# EAGLE board TinkerAccess (EAGLE 9.5.2)
REV: A
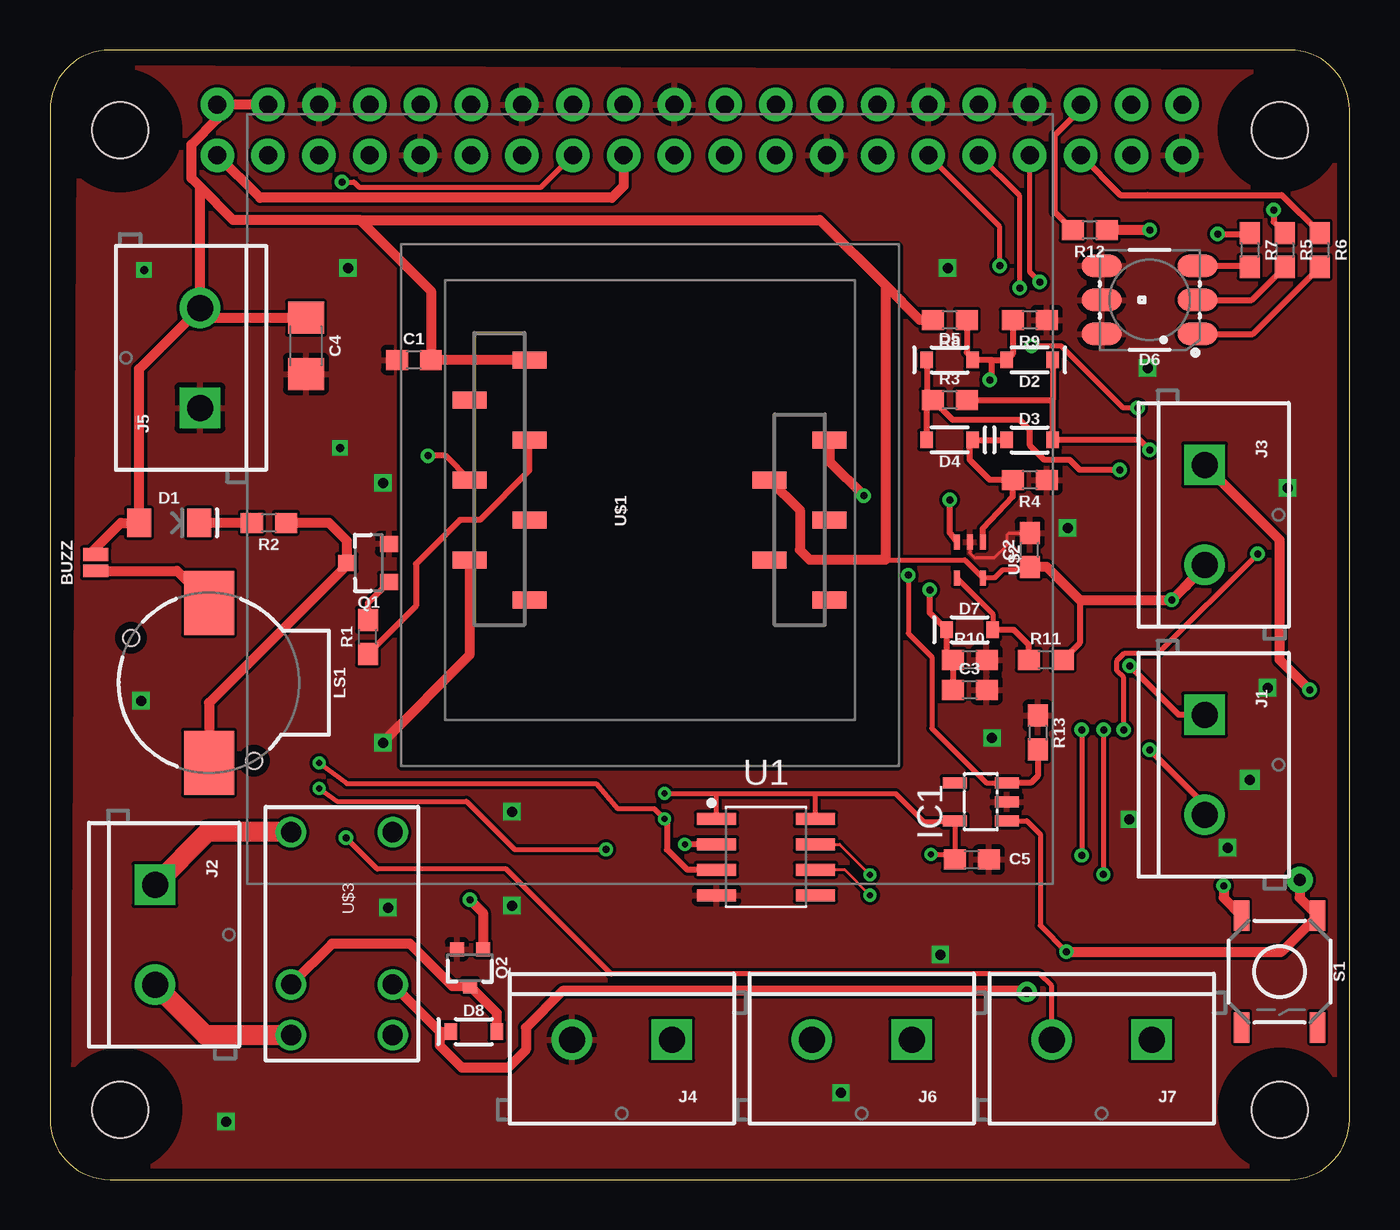
[diagram p0: board, top side]
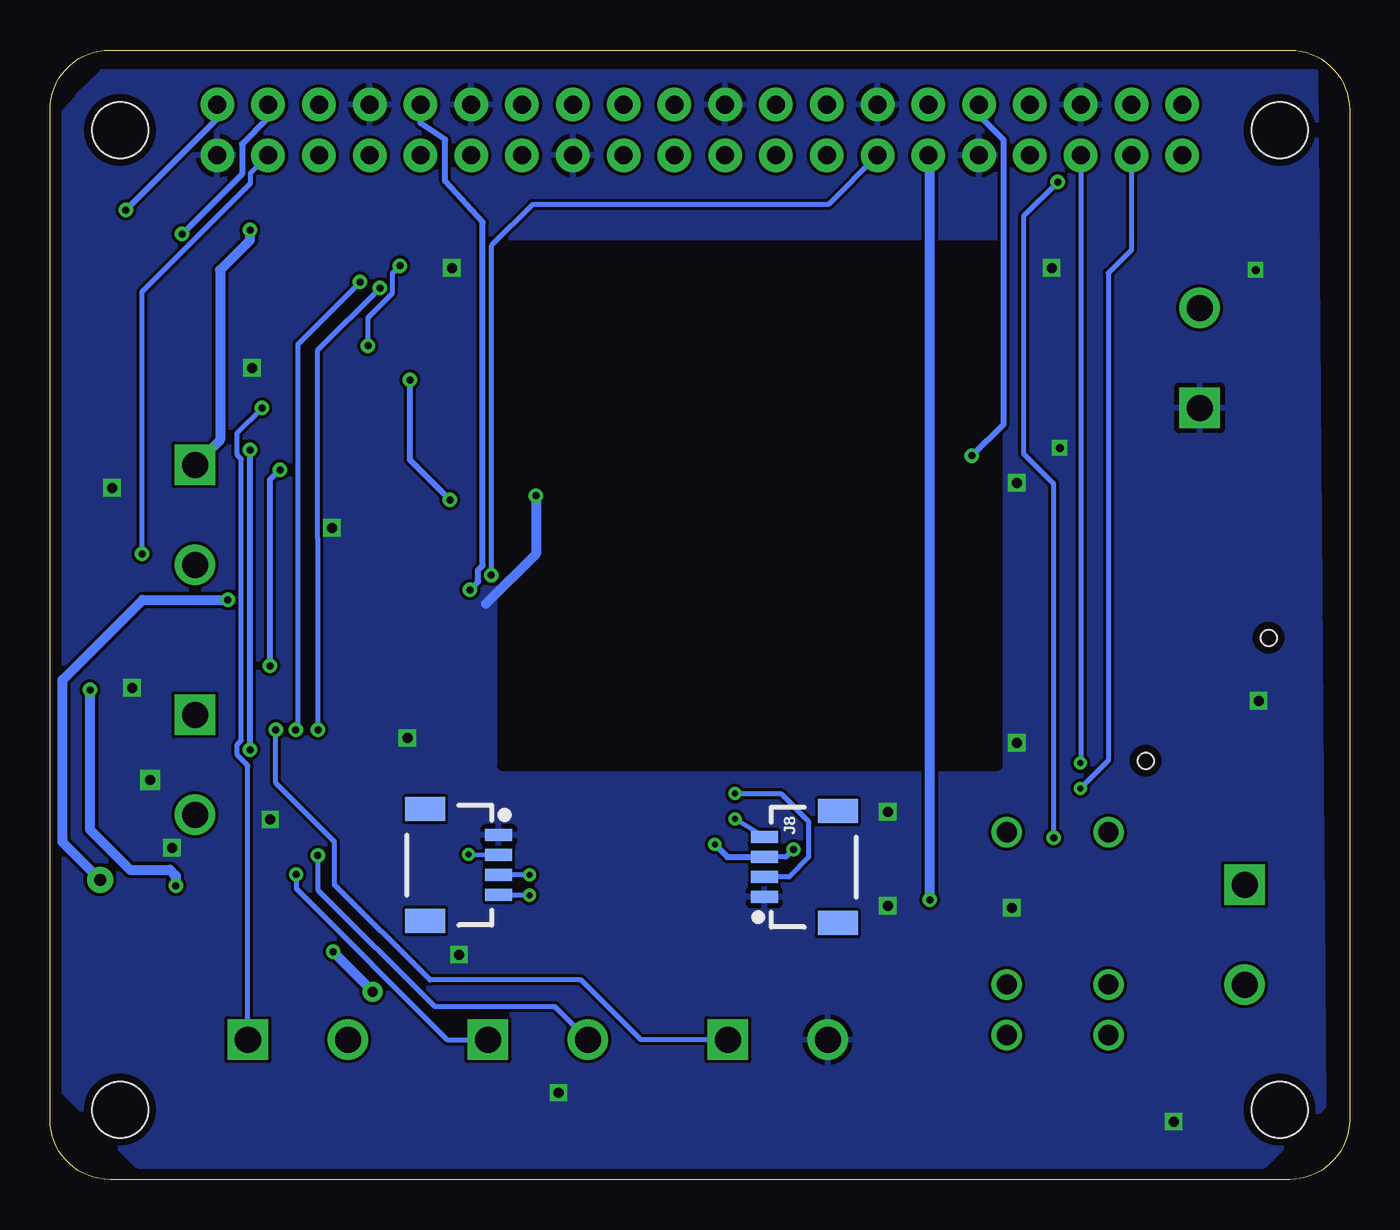
[diagram p1: board, bottom side, seen from below]

Size 65 x 56.5 mm. Coordinates in mm from the lower left corner, seen from the top.
Copper layers (1*16): Top 0.0356mm / dielectric 1.5011mm / Bottom 0.0356mm
Design rules "LaenPCBOrder *": minimum track width 6mil, minimum drill 0.3mm, track to track 6mil, track to pad 6mil, pad to pad 6mil, via to via 6mil, smd to smd 6mil, copper to edge 15mil, drill to drill 6mil, minimum pad ring 7mil, minimum via ring 7mil, stop-mask expansion 3mil, vias tented up to drill 0mil, thermal gap 10mil
tRestrict: area 17.6,20.7 to 42.4,46.7
bRestrict: area 17.6,20.7 to 42.4,46.7

## Footprints (pad centres in the part's own frame; a part is rotated, then mirrored left to right if it is on the bottom)
SMT-JUMPER_2_NC_PASTE_NO-SILK = smd 0.635 x 1.27: 1 -0.406,0; 2 0.406,0
0603 = smd 1.1 x 1: 1 -0.85,0; 2 0.85,0
1206 = smd 1.6 x 1.8: 1 -1.4,0; 2 1.4,0
LED-1206 = smd 1.2 x 1.4: A -1.5,0; C 1.5,0
SOD-323 = smd 0.63 x 0.83: A 1.15,0; C -1.15,0
LED-TRICOLOR-5050 = smd 2 x 1.1: 1 -2.4,1.7; 2 -2.4,0; 3 -2.4,-1.7; 4 2.4,-1.7; 5 2.4,0; 6 2.4,1.7
SOT23-5 = smd 0.55 x 1.2: 1 -0.95,-1.3; 2 0,-1.3; 3 0.95,-1.3; 4 0.95,1.3; 5 -0.95,1.3
SCREWTERMINAL-5MM-2 = drill 1.3 pad 2.032 square: 1 0,0 | drill 1.3 pad 2.032: 2 5,0
1X04_1MM_RA = smd 0.6 x 1.35: 1 -1.5,0; 2 -0.5,0; 3 0.5,0; 4 1.5,0 | smd 1.2 x 2: NC1 2.8,-3.675; NC2 -2.8,-3.675
BUZZER-CCV = smd 3.2 x 2.5: + 4,0; - -4,0 | hole 0.8: -3.9,-2.25; 2.25,3.9
SOT23-3 = smd 0.8 x 0.9: 1 -0.95,-1; 2 0.95,-1; 3 0,1.1
SOT323 = smd 0.7 x 0.7: 1 -0.65,-0.925; 2 0.65,-0.925; 3 0,0.925
PI_HAT_NOSLOTS = drill 0.9 pad 1.676: 1 8.37,51.23; 2 8.37,53.77; 3 10.91,51.23; 4 10.91,53.77; 5 13.45,51.23; 6 13.45,53.77; 7 15.99,51.23; 8 15.99,53.77; 9 18.53,51.23; 10 18.53,53.77; 11 21.07,51.23; 12 21.07,53.77; 13 23.61,51.23; 14 23.61,53.77; 15 26.15,51.23; 16 26.15,53.77; 17 28.69,51.23; 18 28.69,53.77; 19 31.23,51.23; 20 31.23,53.77; 21 33.77,51.23; 22 33.77,53.77; 23 36.31,51.23; 24 36.31,53.77; 25 38.85,51.23; 26 38.85,53.77; 27 41.39,51.23; 28 41.39,53.77; 29 43.93,51.23; 30 43.93,53.77; 31 46.47,51.23; 32 46.47,53.77; 33 49.01,51.23; 34 49.01,53.77; 35 51.55,51.23; 36 51.55,53.77; 37 54.09,51.23; 38 54.09,53.77; 39 56.63,51.23; 40 56.63,53.77 | hole 2.8: 3.5,3.5; 3.5,52.5; 61.5,52.5; 61.5,3.5
TACTILE_SWITCH_SMD_5.2MM = smd 1.524 x 0.762: 1 -2.794,1.905; 2 2.794,1.905; 3 -2.794,-1.905; 4 2.794,-1.905
SOIC127P600X175-8 = smd 1.968 x 0.602: 1 -2.473,1.905; 2 -2.473,0.635; 3 -2.473,-0.635; 4 -2.473,-1.905; 5 2.473,-1.905; 6 2.473,-0.635; 7 2.473,0.635; 8 2.473,1.905
ID-12_SMD = smd 0.85 x 1.7: 1 2.993,-8.998; 2 0.993,-5.998; 3 -1.007,-8.998; 4 -3.007,-5.998; 5 -5.007,-8.998; 6 -5.007,6.013; 7 -3.007,9.013; 8 -1.007,6.013; 9 0.993,9.013; 10 2.993,6.013; 11 6.993,6.013; NC 4.993,9.013
SC-70-5 = smd 0.3 x 0.75: P$1 -0.65,-0.9; P$2 0,-0.9; P$3 0.65,-0.9; P$4 0.65,0.9; P$5 -0.65,0.9
RELAY-G5V = drill 1.016: 1 5.08,2.54; 2 2.54,2.54; 5 -5.08,2.54; 6 -5.08,-2.54; 9 2.54,-2.54; 10 5.08,-2.54

## Placement (x,y rotation side)
BUZZ  JUMPER-SMT_2_NC_PASTE_NO-SILK  [SMT-JUMPER_2_NC_PASTE_NO-SILK]  2.29,30.86 90 top
C1  0.1uF  [0603]  18.2,41 0 top
C2  10uF  [0603]  49,31.5 90 top
C3  10uF  [0603]  46,24.5 0 top
C4  10uF  [1206]  12.8,41.7 270 top
C5  10uF  [0603]  46.1,16 0 top
D1  GREEN  [LED-1206]  5.95,32.85 0 top
D2  250mA/100V  [SOD-323]  49,41 180 top
D3  250mA/100V  [SOD-323]  49,37 0 top
D4  250mA/100V  [SOD-323]  45,37 180 top
D5  250mA/100V  [SOD-323]  45,41 0 top
D6  [LED-TRICOLOR-5050]  55,44 180 top
D7  250mA/100V  [SOD-323]  46,27.5 0 top
D8  1A/23V/620mV  [SOD-323]  21.2,7.4 0 top
IC1  [SOT23-5]  46.56,18.9 90 top
J1  [SCREWTERMINAL-5MM-2]  57.75,23.25 270 top
J2  [SCREWTERMINAL-5MM-2]  5.25,14.75 270 top
J3  [SCREWTERMINAL-5MM-2]  57.75,35.75 270 top
J4  [SCREWTERMINAL-5MM-2]  31.1,7 180 top
J5  [SCREWTERMINAL-5MM-2]  7.5,38.6 90 top
J6  [SCREWTERMINAL-5MM-2]  43.1,7 180 top
J7  [SCREWTERMINAL-5MM-2]  55.1,7 180 top
J8  [1X04_1MM_RA]  29.27,15.63 90 bottom
J9  [1X04_1MM_RA]  42.56,15.73 270 bottom
LS1  BUZZER-SMD  [BUZZER-CCV]  7.95,24.85 90 top
Q1  500mA/300V  [SOT23-3]  15.95,30.85 90 top
Q2  310mA/60V/1.6Ω  [SOT323]  21,10.6 180 top
R1  10M  [0603]  15.9,27.15 90 top
R2  10M  [0603]  10.95,32.85 180 top
R3  1k  [0603]  45,39 0 top
R4  1k  [0603]  49,35 180 top
R5  330  [0603]  61.75,46.5 270 top
R6  150  [0603]  63.5,46.5 270 top
R7  300  [0603]  60,46.5 270 top
R8  1k  [0603]  45,43 180 top
R9  1k  [0603]  49,43 180 top
R10  1k  [0603]  46,26 0 top
R11  10k  [0603]  49.8,26 0 top
R12  10k  [0603]  52,47.5 180 top
R13  10k  [0603]  49.4,22.35 270 top
RPI1  RASPBERRYPI_BPLUS_HATNOSLOTS  [PI_HAT_NOSLOTS]  0,0 0 top
S1  LogOut  [TACTILE_SWITCH_SMD_5.2MM]  61.5,10.4 270 top
U1  SOIC-8SOIC-8  [SOIC127P600X175-8]  35.81,16.13 0 top
U$1  ID-12/20SMD  [ID-12_SMD]  30,34 90 top
U$2  ADCMP-371  [SC-70-5]  46,31 180 top
U$3  RELAY-SPDT-2-G5V  [RELAY-G5V]  14.6,12.3 270 top

## Library data of the parts
BUZZ = SparkFun-Jumpers
C1 = SparkFun-Capacitors; PROD_ID: CAP-00810
C2 C3 C5 = SparkFun-Capacitors; PROD_ID: CAP-11015
C4 = SparkFun-Capacitors; PROD_ID: CAP-10057
D1 = SparkFun-LED; PROD_ID: DIO-00862
D2-D5 D7 = SparkFun-DiscreteSemi; PROD_ID: DIO-09646
D6 = SparkFun-LED; PROD_ID: DIO-10298
D8 = SparkFun-DiscreteSemi; PROD_ID: DIO-11623
IC1 = v-reg-micrel; OC_FARNELL: unknown; OC_NEWARK: unknown
J1-J7 = SparkFun-Connectors; SF_SKU: PRT-08432
J8 J9 = SparkFun-Connectors
LS1 = SparkFun-Electromechanical; PROD_ID: COMP-08568
Q1 = SparkFun-DiscreteSemi; PROD_ID: TRANS-09116
Q2 = SparkFun-DiscreteSemi; PROD_ID: TRANS-11151
R1 R2 = SparkFun-Resistors; PROD_ID: RES-08283
R3 R4 R8-R10 = SparkFun-Resistors; PROD_ID: RES-07856
R5 = SparkFun-Resistors; PROD_ID: RES-00818
R6 = SparkFun-Resistors; PROD_ID: RES-11028
R7 = SparkFun-Resistors; PROD_ID: RES_10328
R11-R13 = SparkFun-Resistors; PROD_ID: RES-00824
RPI1 = microbuilder
S1 = SparkFun-Switches; PROD_ID: SWCH-08247; SF_SKU: COM-08720
U1 = TinkerMill; PARTNUMBER: Si8600
U$1 = SparkFun-RF; PROD_ID: CONN-09345, CONN-09344
U$2 = TinkerMill
U$3 = SparkFun-Retired; SF_SKU: COM-00524

## Nets
3.3V: RPI1.1 RPI1.17
3.3V_EN: IC1.3 R13.2 RPI1.13
5V: BUZZ.2 C1.2 C2.1 C4.1 D1.A D8.C IC1.1 J3.2 J5.2 R8.2 R11.2 RPI1.2 RPI1.4 S1.1 U$1.2 U$1.11 U$2.P$5 U$3.2
+3V3: C5.1 IC1.5 J8.2 J9.2 U1.1 U1.8
AC1: D4.A D5.C J1.1 R3.1
AC2: D2.C D3.A J1.2 R3.2
BSCL: J9.4 U1.6
BSDA: J9.3 U1.7
COMPOUT: D7.A R11.1 U$2.P$4
EECLK: RPI1.28
EEDATA: RPI1.27
GND: C1.1 C2.2 C3.2 C4.2 C5.2 D6.4 D6.5 D6.6 IC1.2 J4.2 J5.1 J8.1 J9.1 Q1.2 Q2.2 R4.1 R9.1 R10.2 R13.1 RPI1.6 RPI1.9 RPI1.14 RPI1.20 RPI1.25 RPI1.30 RPI1.34 RPI1.39 U1.4 U$1.1 U$1.7 U$2.P$2
GPIO4: RPI1.7
GPIO5: J7.1 RPI1.29
GPIO6: J6.2 RPI1.31
GPIO12: C3.1 D7.C R10.1 RPI1.32
GPIO13: J6.1 RPI1.33
GPIO16: R12.2 RPI1.36
GPIO18: RPI1.12
GPIO22: J7.2 RPI1.15
GPIO23: RPI1.16
GPIO24: RPI1.18
GPIO25: RPI1.22
GPIO26: J4.1 RPI1.37
LED_BLUE: R7.1 RPI1.38
LED_GREEN: R6.1 RPI1.35
LED_RED: R5.1 RPI1.40
LED_RFID: R1.1 U$1.10
LOGOUT: J3.1 R12.1 S1.3
N$1: Q1.1 R1.2
N$2: BUZZ.1 LS1.+
N$3: LS1.- Q1.3 R2.1
N$4: D1.C R2.2
N$5: D8.A Q2.3 U$3.9
N$6: J2.1 U$3.6
N$7: J2.2 U$3.10
N$8: U1.5
N$9: D6.2 R5.2
N$10: D6.1 R6.2
N$11: D6.3 R7.2
RECT+: D3.C D4.C R4.2 U$2.P$1
RECT-: D2.A D5.A R8.1 R9.2 U$2.P$3
RELAY: Q2.1 RPI1.11
RXD: RPI1.10 U$1.9
SCL: J8.4 RPI1.5 U1.3
SDA: J8.3 RPI1.3 U1.2
SPI_CE0: RPI1.24
SPI_CE1: RPI1.26
SPI_MISO: RPI1.21
SPI_MOSI: RPI1.19
SPI_SCLK: RPI1.23
TXD: RPI1.8

## Tracks (layer width: path | path; a pad name or v marks a point on that pad's centre or on a via)
3.3V
  Top 0.508: RPI1.17 28.69,49.69 28.1,49.1 10.5,49.1 RPI1.1
3.3V_EN  (via drill 0.35)
  Top 0.254: v42.93,30.23 42.93,27.32 44.11,26.14 44.11,22.57 46.83,19.85 IC1.3
  Top 0.305: R13.2 49.4,20.19 49.06,19.85 IC1.3
  Bottom 0.254: RPI1.13 26.07,48.77 40.87,48.77 42.93,46.71 v42.93,30.23
5V  (via drill 0.35, 0.5 pad 1, 0.6 pad 1.3)
  Top 0.254: v48.86,9.4 48.88,9.43 | BUZZ.2 1.96,31.27 1.95,31.26 | 50.86,11.4 v50.84,11.4 49.53,12.71 49.53,17.27 48.85,17.95 IC1.1 | 41.78,31 45.75,31 U$2.P$5 47.24,30.1 47.62,30.48 48.83,30.48
  Top 0.305: 51.5,29 51.5,26.85 R11.2
  Top 0.5: RPI1.4 RPI1.2 8.37,53.06 7.08,51.77 7.08,50.08 | D1.A 3.54,32.85 1.95,31.26 | U$1.2 37.5,33.49 37.5,31.5 38,31 41.78,31 | 51.5,29 49.85,30.65 C2.1 48.83,30.48 | U$1.11 C1.2 19.05,44.45 15.5,48 | 15.5,48 38.5,48 41.8,44.7 | R8.2 43.5,43 41.8,44.7 | 41.8,36.7 41.8,44.7 | 15.5,48 9.16,48 | 19.5,7.4 D8.C | 19.5,7.4 U$3.2 | 48.88,9.43 25.63,9.43 23.8,7.6 23.8,6.5 22.9,5.6 20.6,5.6 19.5,6.7 19.5,7.4
  Top 0.508: 4.25,33.05 D1.A 4.45,40.55 J5.2 | 41.8,36.7 41.8,31.02 41.78,31 | 51.5,29 v56.1,29 | 56.1,29.1 v56.1,29 | v56.1,29 56.75,29.65 J3.2 | 7.5,49.66 7.08,50.08 | J5.2 7.5,49.66 | 9.16,48 7.5,49.66 | C4.1 8,43.1 J5.2 | v62.5,15 62.5,14.1 S1.1 61.61,11.4 50.86,11.4
  Bottom 0.254: v48.86,9.4 48.84,9.4
  Bottom 0.5: v62.5,15 64.37,16.87 64.37,25 60.37,29
  Bottom 0.508: 60.37,29 v56.1,29 | 48.84,9.4 v50.84,11.4
+3V3  (via drill 0.3)
  Top 0.254: 45.26,16.26 IC1.5 45.22,17.91 43.69,17.91 42.29,19.3 38.35,19.3 | 45.26,16.26 C5.1 | v44.07,16.26 45.26,16.26 | v30.73,19.3 33.4,19.3 | 33.4,19.3 38.35,19.3 | U1.8 38.29,19.24 38.35,19.3 | U1.1 33.34,19.24 33.4,19.3
  Bottom 0.254: v44.07,16.26 J9.2 | v30.73,19.3 28.45,19.3 27.05,17.91 27.05,16.13 28.05,15.13 J8.2
AC1  (via drill 0.35)
  Top 0.3: D4.A 43.85,38.7 R3.1 | D5.C 43.85,39.3 R3.1 | v53.5,35.5 51.5,35.5 51,36 49.74,36 49.02,36.71 49.02,36.72 49,36.75 49,37.5 48.5,38 45.15,38 R3.1 | J1.1 56.45,23.25 v54,25.7
  Bottom 0.3: 53.99,35.01 54,35 | 53.99,35.01 v53.5,35.5 | v54,25.7 54,35 | 54,35 53.99,35.01
AC2  (via drill 0.35)
  Top 0.3: D2.C 50.15,39.01 | 50.15,39.01 D3.A 54.5,37 v55,36.5 | R3.2 50.14,39 50.15,39.01 | J1.2 57.75,18.75 v55,21.5
  Bottom 0.3: v55,21.5 v55,36.5
BSCL  (via drill 0.3)
  Top 0.152: v41.02,14.22 39.75,15.49 U1.6
  Bottom 0.254: J9.4 42.55,14.22 v41.02,14.22
BSDA  (via drill 0.3)
  Top 0.152: U1.7 39.5,16.76 v41.02,15.24
  Bottom 0.254: v41.02,15.24 v41.03,15.23 J9.3
COMPOUT
  Top 0.254: U$2.P$4 47.15,28.3 D7.A
  Top 0.305: R11.1 48.95,26.75 48.2,27.5 D7.A
GND  (via drill 0.35, 0.4 pad 0.55, 0.5 pad 0.55, 0.5 pad 1)
  Top 0.152: 46.1,31.24 46,31.34 U$2.P$2 | 46.1,31.24 46.23,31.11 | 46.1,31.24 46.23,31.11 | 46.23,31.11 47.24,31.11 47.88,31.75 47.88,32.26 47.97,32.35 C2.2
  Top 0.3: U$2.P$2 46,31.64
  Top 0.5: U$1.7 20.99,26.23 16.6,21.84 | U$1.1 39,35.9 v40.7,34.2
  Bottom 0.5: v40.7,34.2 40.7,31.3 43.2,28.8
  other vias: 14.5,36.6 60,20 4.55,23.95 16.9,13.6 23.1,13.7 23.1,18.4 16.65,21.85 60.9,24.6 61.9,34.6 16.65,34.85 14.9,45.6 44.9,45.6 50.9,32.6 54.9,40.6 58.9,16.6 53.98,18.02 8.8,2.9 4.7,45.5 39.56,4.33 44.54,11.25 47.12,22.08
  pour Top: 62.3,55.4 63.5,54.2 63.5,54.1 64.2,53.4 64.2,4.4 60.5,0.7 4.2,0.7 1.2,3.7 1.5,55.6
  pour Bottom: 62.4,55.4 63.6,54.2 63.6,54.1 64.3,53.4 64.3,4.4 60.6,0.7 4.3,0.7 1.3,3.7 1.7,55.4
GPIO5  (via drill 0.35)
  Top 0.254: v49.1,41.7 v49.11,41.69 50.58,41.69 53.67,38.6 v54.4,38.6 | v47.5,45.7 47.5,47.66 RPI1.29
  Bottom 0.254: J7.1 55.1,20.71 55.63,21.24 55.63,21.76 55.43,21.96 55.43,36.03 55.63,36.24 55.63,37.37 v54.4,38.6 | v47.5,45.7 47.87,45.33 47.87,44.34 49.1,43.11 v49.1,41.7
GPIO6  (via drill 0.35)
  Top 0.254: v51.6,16.21 v51.6,22.5 | v48.5,44.6 48.5,49.2 RPI1.31
  Bottom 0.254: v51.6,16.21 51.6,14.49 45.76,8.65 39.75,8.65 J6.2 | v51.6,22.5 51.6,32.05 51.61,32.06 51.61,41.49 v48.5,44.6
GPIO12  (via drill 0.35)
  Top 0.3: C3.1 R10.1 44.85,26.3 D7.C 44,28.35 v44,29.5
  Bottom 0.3: RPI1.32 46.47,52.84 45.23,52 45.23,49.93 43.35,47.89 43.35,30.72 43.58,30.5 43.58,29.92 v44,29.5
GPIO13  (via drill 0.35)
  Top 0.254: 52.7,15.25 52.68,15.24 | 52.7,15.25 v52.7,22.5 | v49.5,44.9 49.01,45.39 RPI1.33 | v52.68,15.26 v52.69,15.26 52.7,15.25
  Bottom 0.254: v52.68,15.26 52.68,14.55 45.13,7 J6.1 | v52.7,22.5 52.6,22.6 52.6,41.8 v49.5,44.9
GPIO16
  Top 0.3: R12.2 50.25,48.4 50.25,52.25 51.55,53.55 RPI1.36
GPIO22  (via drill 0.35)
  Top 0.254: J7.2 50.1,9.68 49.5,10.28 28.07,10.28 22.82,15.53 16.37,15.53 v14.8,17.1 | v14.6,49.9 15.2,49.9 15.47,49.63 24.55,49.63 RPI1.15
  Bottom 0.254: v14.8,17.1 14.8,34.8 16.3,36.3 16.3,48.2 v14.6,49.9
GPIO26  (via drill 0.35)
  Top 0.254: v60.4,31.3 55.43,26.33 53.74,26.33 53.37,25.96 53.37,25.44 53.7,25.11 v53.7,22.5
  Bottom 0.254: RPI1.37 54.97,50.35 54.97,49.84 60.4,44.41 v60.4,31.3 | J4.1 35.45,7 38.43,9.98 46,9.98 50.78,14.76 50.78,16.91 53.7,19.83 v53.7,22.5
LED_BLUE  (via drill 0.35)
  Top 0.3: v58.4,47.3 59.95,47.3 R7.1
  Bottom 0.3: RPI1.38 54.09,53.11 55.4,51.8 55.4,50.3 v58.4,47.3
LED_GREEN
  Top 0.3: R6.1 61.6,49.25 54.9,49.25
  Top 0.305: RPI1.35 53.53,49.25 54.9,49.25
LED_RED  (via drill 0.35)
  Top 0.3: v61.2,48.5 61.2,47.9 R5.1
  Bottom 0.3: RPI1.40 56.63,53.07 v61.2,48.5
LED_RFID
  Top 0.305: U$1.10 23.99,35.49 21.5,33 20.5,33 18.3,30.8 18.3,28.7 R1.1
LOGOUT  (via drill 0.35)
  Top 0.508: v63,24.5 61.5,26 61.5,32 J3.1 | v55,47.5 R12.1 | v58.7,14.7 58.7,14.09 S1.3
  Bottom 0.508: v63,24.5 63,17.5 61,15.5 59,15.5 58.7,15.2 v58.7,14.7 | v55,47.5 55,47 56.5,45.5 56.5,37 J3.1
N$1
  Top 0.305: R1.2 15.9,28.85 Q1.1
N$2
  Top 0.254: BUZZ.1 2.27,30.44 1.95,30.44
  Top 0.5: 1.95,30.44 6.36,30.44 LS1.+
N$3
  Top 0.5: LS1.- 7.95,23.85 14.85,30.75 Q1.3 14.85,31.95 13.95,32.85 R2.1
N$4
  Top 0.5: R2.2 D1.C
N$5
  Top 0.5: D8.A 22.35,8.32 Q2.3 20.12,9.68 18,11.8 14.1,11.8 U$3.9
N$6
  Top 1: U$3.6 7.88,17.38 J2.1
N$7
  Top 1: U$3.10 7.78,7.22 J2.2
N$9
  Top 0.3: D6.2 60.1,44 R5.2
N$10
  Top 0.3: D6.1 60.15,42.3 R6.2
N$11
  Top 0.3: D6.3 59.95,45.7 R7.2
RECT+
  Top 0.3: D3.C D4.C 46,36.85 46,36 47,35 R4.2 48.15,34.15 46.65,32.55 U$2.P$1
RECT-  (via drill 0.35)
  Top 0.3: 47.11,41 D2.A 48.15,41.3 R9.2 | 47.11,41 46.22,41 | 46.22,41 D5.A | R8.1 45.85,41.37 46.22,41 | U$2.P$3 45,32.35 v45,34 | v47,40 47.11,40.11 47.11,41
  Bottom 0.3: v45,34 47,36 v47,40
RELAY  (via drill 0.35)
  Top 0.5: v21,14 21.65,13.35 Q2.1
  Bottom 0.508: RPI1.11 21,51.16 v21,14
RXD  (via drill 0.35)
  Top 0.305: U$1.9 19.78,36.2 v18.9,36.2
  Bottom 0.305: v18.9,36.2 17.3,37.8 17.3,52 18.53,53.23 RPI1.10
SCL  (via drill 0.3)
  Top 0.254: v13.46,20.83 14.86,19.81 27.3,19.81 28.39,18.54 30.23,18.54 v30.73,18.03
  Top 0.305: U1.3 31.88,15.49 30.86,16.51 30.86,17.91 v30.73,18.03
  Bottom 0.254: RPI1.5 v13.45,20.84 v13.46,20.83 | J8.4 v30.73,18.03
SDA  (via drill 0.3, 0.35)
  Top 0.254: v13.46,19.56 14.35,18.92 20.83,18.92 23.24,16.51 v27.81,16.51
  Top 0.305: U1.2 v31.75,16.76
  Bottom 0.254: RPI1.3 10.91,46.49 12.06,45.34 12.06,20.95 v13.46,19.56 | v27.81,16.51 28.19,16.13 J8.3
  Bottom 0.305: v31.75,16.76 31.12,16.13 J8.3

## Text on the board
tSilk: Sensitivity